# Altium PCB alarm.PcbDoc
Units mm, origin at the board's own origin, x right, y up, seen from the top; angles counter-clockwise.
Board outline 152.4 x 101.6 mm, 2 copper layers (Top Layer, Bottom Layer); 9 components, 7 nets, 29 pads, 0 vias.
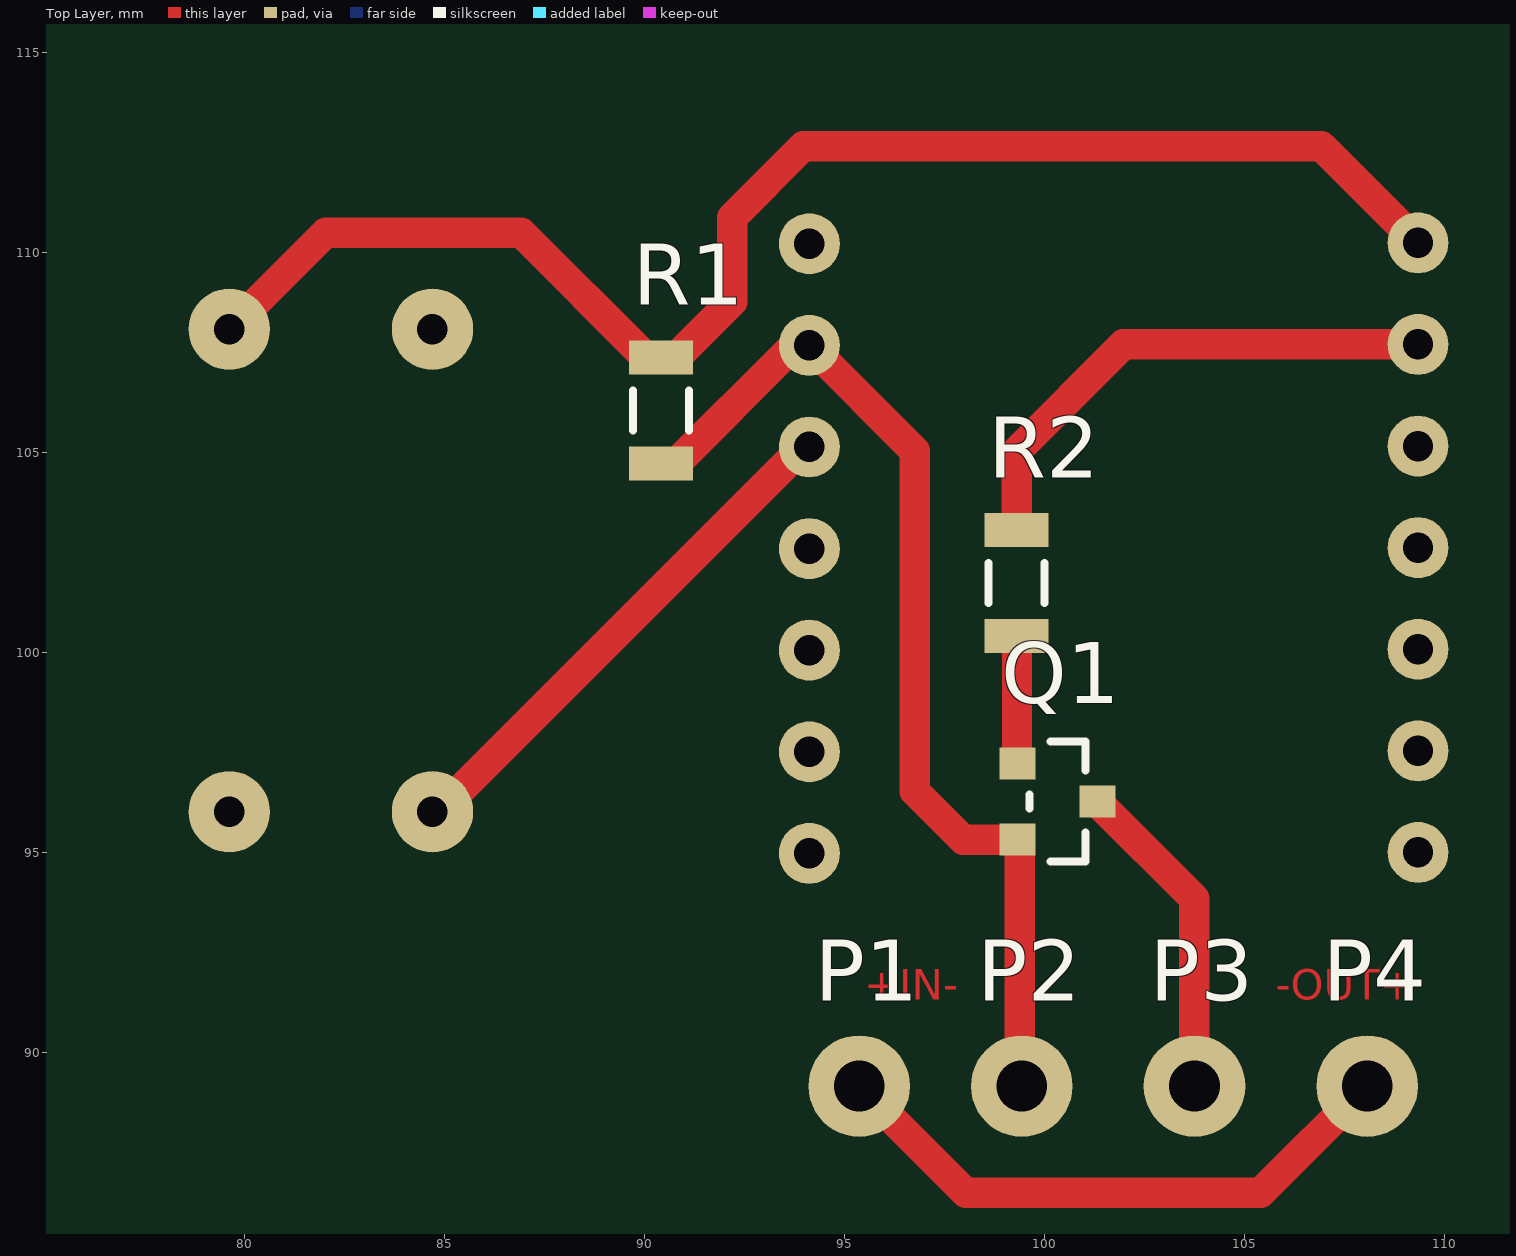
[diagram p0: Top Layer view]
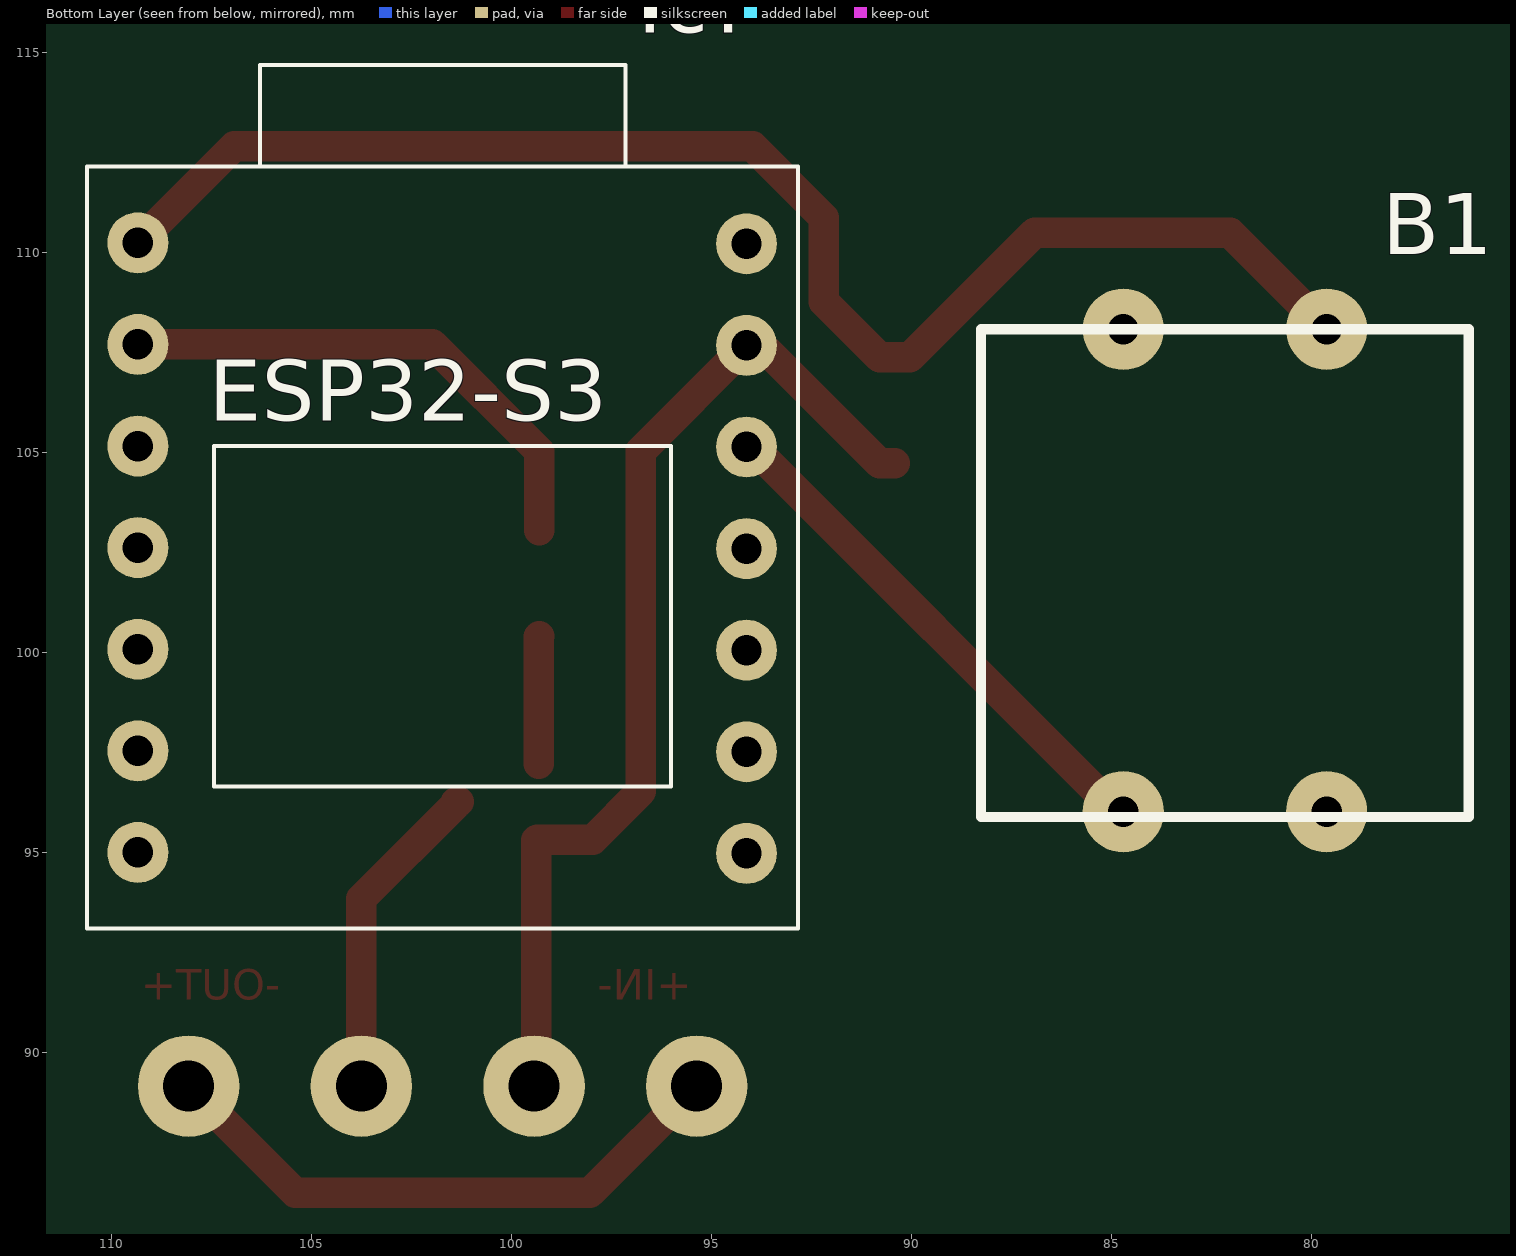
[diagram p1: Bottom Layer view, seen from below]

## Layer stack, top to bottom
Top Solder: solder mask 0.0102, Solder Resist, Dk 3.5
Top Layer: signal copper 0.0356
Dielectric 1: dielectric 0.32, FR-4, Dk 4.8
Bottom Layer: signal copper 0.0356
Bottom Solder: solder mask 0.0102, Solder Resist, Dk 3.5

## Board outline
25.4,25.4 177.8,25.4 177.8,127 25.4,127

## Design rules (kind name [scope] priority, off if disabled: settings)
Clearance [All] p1: gap=0.254 ignorepadtopadclearanceinfootprint=FALSE except(0: Arc-Hole Track-Hole SMDPad-Hole THPad-Hole Via-Hole Fill-Hole Poly-Hole Region-Hole Text-Hole)
PolygonConnect [All] p1: connectstyle=Relief reliefconductorwidth=0.254 reliefentries=4 polygonreliefangle="90 Angle" airgapwidth=0.254
RoutingVias [All] p1: holewidth=0.711 width=1.27 viastyle="Through Hole" minholewidth=0.711 minwidth=1.27 maxholewidth=0.711 maxwidth=1.27
SolderMaskExpansion [All] p1: expansion=0.102 istentingtop=FALSE
Width [All] p1: maxlimit=1.27 minlimit=0.254 preferedwidth=0.762 minimp=50.000000 maximp=50.000000 favimp=50.000000
30 further rules are at their usual default settings.

## Components (designator, comment, footprint, x,y, rotation, side; value= is the part's Value field where it differs from the comment)
B1 "button 12x12" button12x12 82.169,101.981 r90 bottom
Ic? "ESP32-S3_xiao" ESP32-S3 101.727,102.616 r180 bottom
P1 "Pin" Pin 95.377,89.154 r0 top
P2 "Pin" Pin 99.441,89.154 r0 top
P3 "Pin" Pin 103.759,89.154 r0 top
P4 "Pin" Pin 108.077,89.154 r0 top
Q1 "DMG2302UK-7" FP-SOT23-MFG 100.33,96.266 r0 top
R1 "RC1206FR-10750RL" RESC3116X65X40LL10T20 90.424,106.045 r270 top
R2 "RC1206FR-10750RL" RESC3116X65X40LL10T20 99.314,101.727 r90 top

## Footprints (in the part's own frame and the unit in brackets; to place one, negate y for a bottom-side part, rotate by r counter-clockwise, add the part's x,y. Pads: shape width x height; smd on the part's side, far side on the other; paste and mask are expansions set on the pad)
button12x12 [mil]
  round 80 hole 30: 1(-235,100) 2(240,100) 3(-235,-100) 4(240,-100)
  silkscreen extent -240,-240 240,240
ESP32-S3 [mil]
  round 60 hole 30: 1(-300,300) 2(-300,200) 3(-300,100) 4(-300,0) 5(-300,-100) 6(-300,-200) 7(-300,-300) 8(299.07,-300.93) 9(299.07,-200.93) 10(299.07,-100.93) 11(299.07,-0.93) 12(299.07,99.07) 13(299.07,199.07) 14(299.07,299.07)
  silkscreen extent -350,-375 350,475
FP-SOT23-MFG [mm]
  rect 0.9x0.8 smd paste+0 mask+0: 1(-1,0.95) 2(-1,-0.95) 3(1,0)
  silkscreen extent -0.7,-1.5 0.7,1.5, body extent -1.55,-1.6 1.55,1.6, height 0.25
Pin [mm]
  round 2.54 hole 1.27: 1(0,0)
RESC3116X65X40LL10T20 [mm] "Chip Resistor, 2-Leads, Body 3.10x1.60mm, IPC High Density"
  rect 0.85x1.6 smd: 1(-1.325,0) 2(1.325,0)
  silkscreen extent -0.5,-0.7 0.5,0.7, body extent -1.6,-0.85 1.6,0.85, height 0.65

## Part data
B1: library part button12x12
Q1: library part CMP-12801-000001-1, "MOSFET N-CH 20V 2.8A SOT23", Continuous Drain Current=2.8A, Drain To Source Breakdown Voltage=20V, Drain To Source Resistance=61mΩ, Gate To Source Voltage=12V, Input Capacitace At Vds="130pF @ 10V", Manufacturer="Diodes Inc.", Max Forward Diode Voltage=1.2V, Max Junction Temp=+150°C, Package=SOT23, Power Dissipation=0.66W, Pulse Drain Current=12A, Temperature="-55°C to +150°C", Temperature Range Low=-55°C, Typ Forward Diode Voltage=0.7V, Automotive=Yes, Automotive Grade="Grade 0", Category=Trans, ComponentLink2Description=Datasheet, ComponentLink2URL=https://www.diodes.com/assets/Datasheets/DMG2302UK.pdf, Depletion Mode=False, Device Class L1="Discrete Semiconductors", Device Class L2=Transistors, Device Class L3=MOSFETs, Digikey Description="MOSFET N-CH 20V 2.8A SOT23", Drain To Source Voltage=20V, Footprint Url=https://www.diodes.com/assets/Package-Files/SOT23.pdf, Gate Charge At Vgs="2.8nC @ 10V", Height=1.1mm, Lead Free=Yes, Manufacturer Part Number=DMG2302UK-7, Number Of Channels=1, Number Of N Channels=1, Octopart=https://octopart.com/dmg2302uk-7-diodes+inc.-73850182, Reverse Recovery Charge=0.5nC, Reverse Recovery Time=5.3ns, RoHS=TRUE, Rthja Max=192°C/W, Standoff Height=0.013mm, Temperature Range High=+150°C, Threshold Vgs Max=1V, Threshold Vgs Min=0.3V, Turn Off Delay Time=4.2ns, Turn On Delay Time=0.6ns
R1 R2: library part CMP-2003-04964-1, Manufacturer=Yageo, Part Number=RC1206FR-10750RL

## Nets (pads, with @x,y where several pads share a name; then routed paths per layer and width w, separated by ;. In a path a pad name is that pad's centre, name@x,y a point inside that pad or via, vN(x,y) a via of type N, cw(c..) or ccw(c..) an arc to the next point about the centre after c; other vN are vias at no path point)
GND: Ic?.13 P2.1 Q1.2 R1.2 | length 26.5
  Top Layer w0.762: R1.2 90.799,104.72 93.606,107.527 93.985,107.527 Ic?.13 96.769,105.034 96.769,96.525 97.978,95.316 99.366,95.316 99.386,95.297 99.386,89.209 P2.1
NetB1_1: B1.1 Ic?.12 | length 13.2
  Top Layer w0.762: B1.1 84.86,96.012 93.98,105.132 Ic?.12
NetB1_4: B1.4 Ic?.1 R1.1 | length 36.4
  Top Layer w0.762: B1.4 82.042,110.49 86.929,110.49 90.049,107.37 R1.1 90.799,107.37 92.197,108.768 92.197,110.866 93.98,112.649 106.934,112.649 Ic?.1
NetIc?_2: Ic?.2 R2.2 | length 13.1
  Top Layer w0.762: R2.2 99.314,105.029 101.981,107.696 Ic?.2
NetP1_1: P1.1 P4.1 | length 14.9
  Top Layer w0.762: P1.1 98.044,86.487 105.41,86.487 P4.1
NetP3_1: P3.1 Q1.3 | length 8.1
  Top Layer w0.762: Q1.3 101.38,96.266 101.399,96.247 101.399,96.197 103.759,93.837 P3.1
NetQ1_1: Q1.1 R2.1 | length 3.2
  Top Layer w0.762: R2.1 99.322,100.394 99.322,97.224 Q1.1
pads on no net: B1.2 B1.3 Ic?.3 Ic?.4 Ic?.5 Ic?.6 Ic?.7 Ic?.8 Ic?.9 Ic?.10 Ic?.11 Ic?.14

## Other copper
Top Layer:
  text "+IN-" at 95.504,91.313 h0.76
  text "-OUT+" at 105.791,91.313 h0.76

## Text inside footprints (layer, text, board x,y; h text height)
Ic?: Bottom Overlay "ESP32-S3" at 107.569,105.791 h1.52